# Altium PCB if-amp.PcbDoc
Units mm, origin at the board's own origin, x right, y up, seen from the top; angles counter-clockwise.
Board outline 50 x 50 mm, 2 copper layers (Top Layer, Bottom Layer), stack 1.57 mm thick; 38 components, 17 nets, 78 pads, 96 vias.
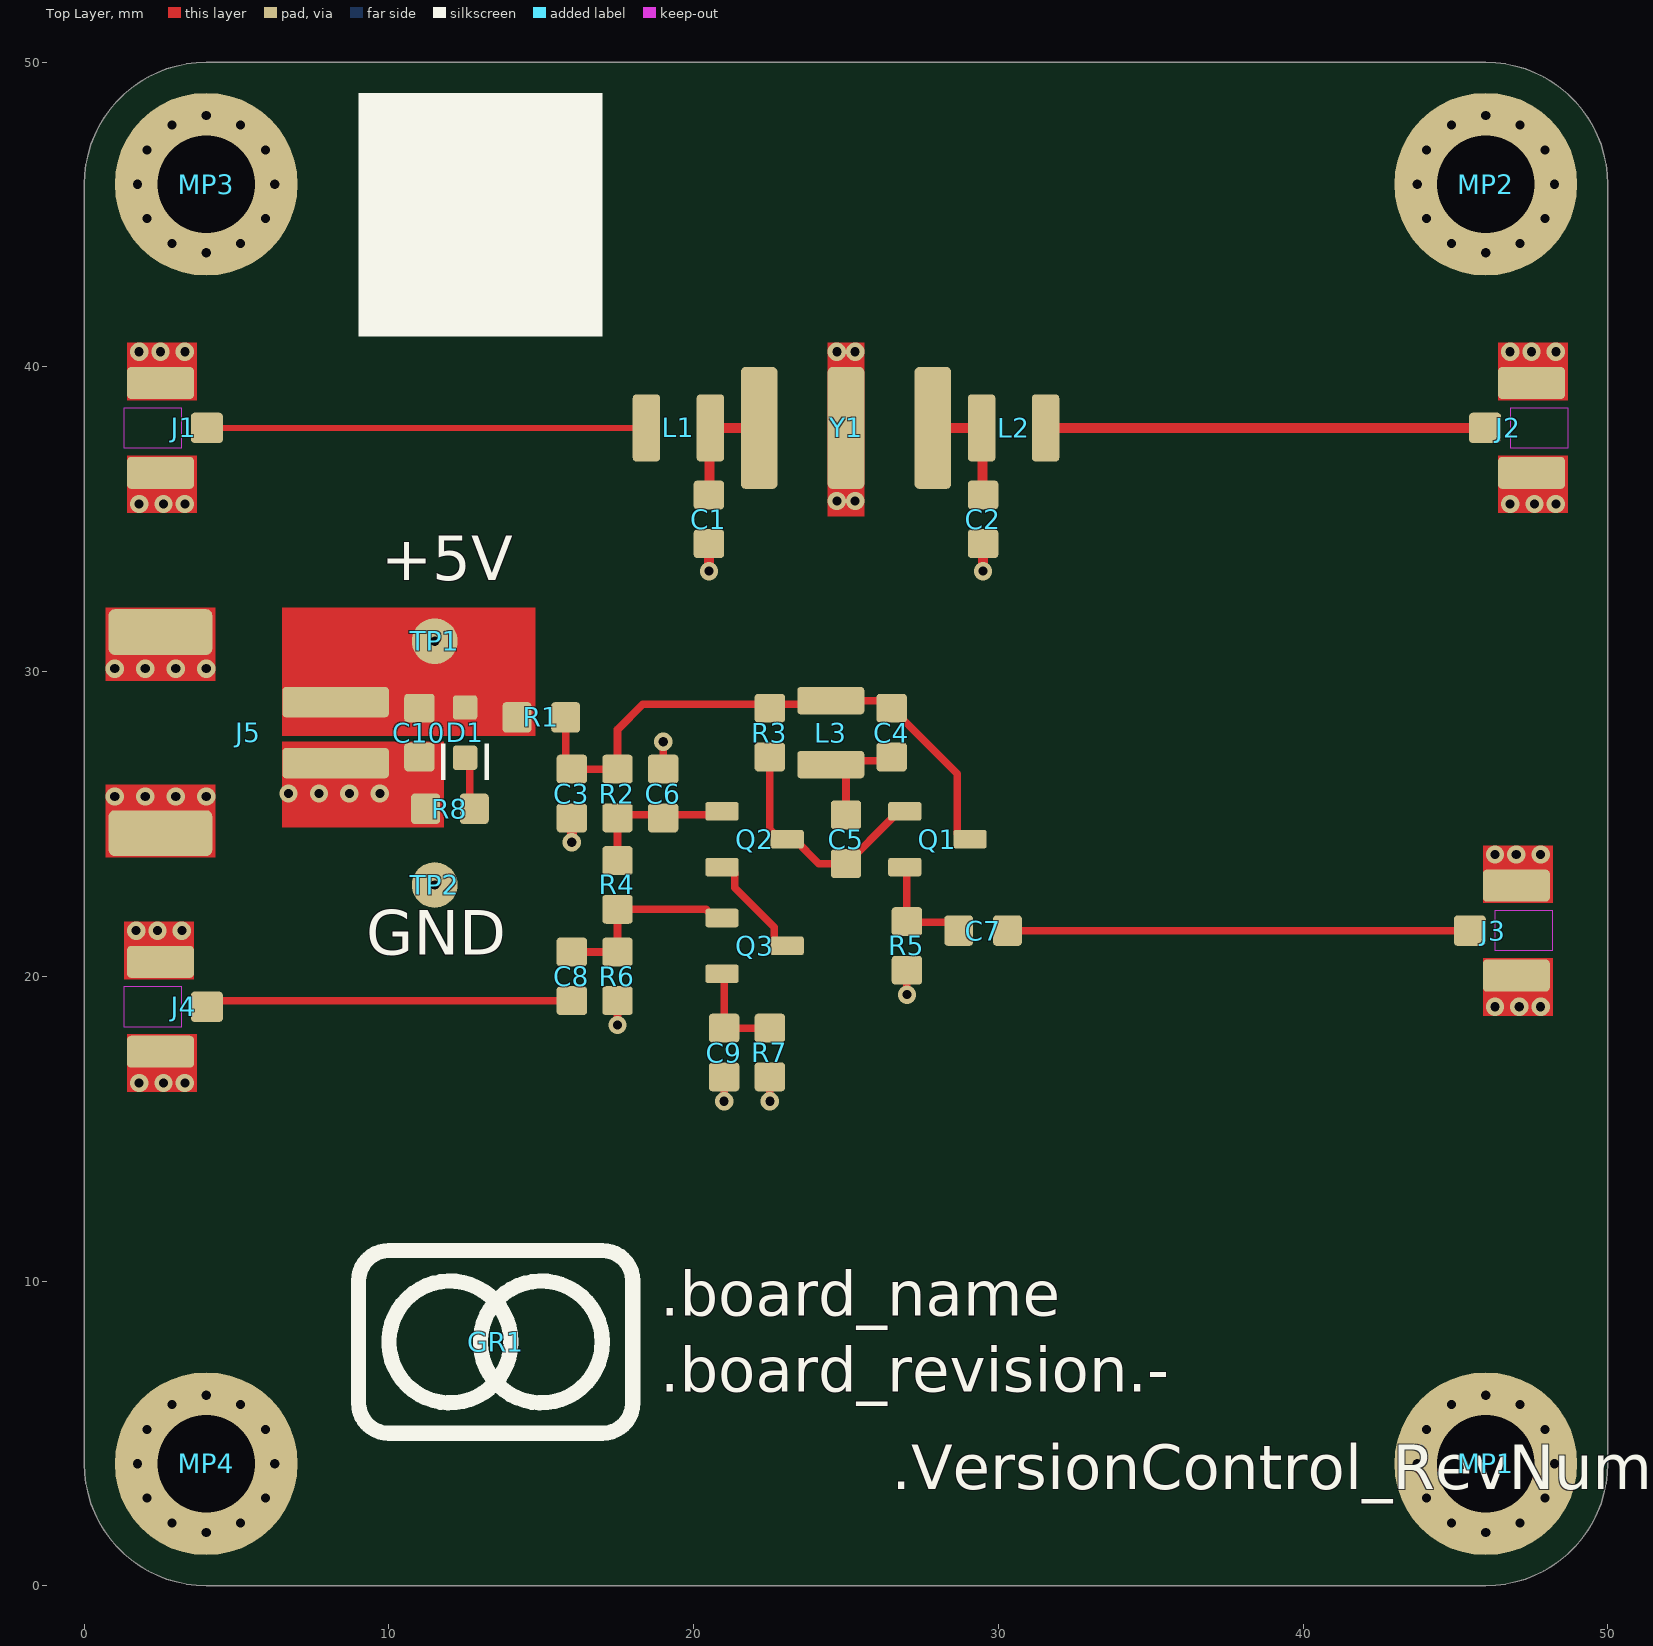
[diagram p0: Top Layer view]
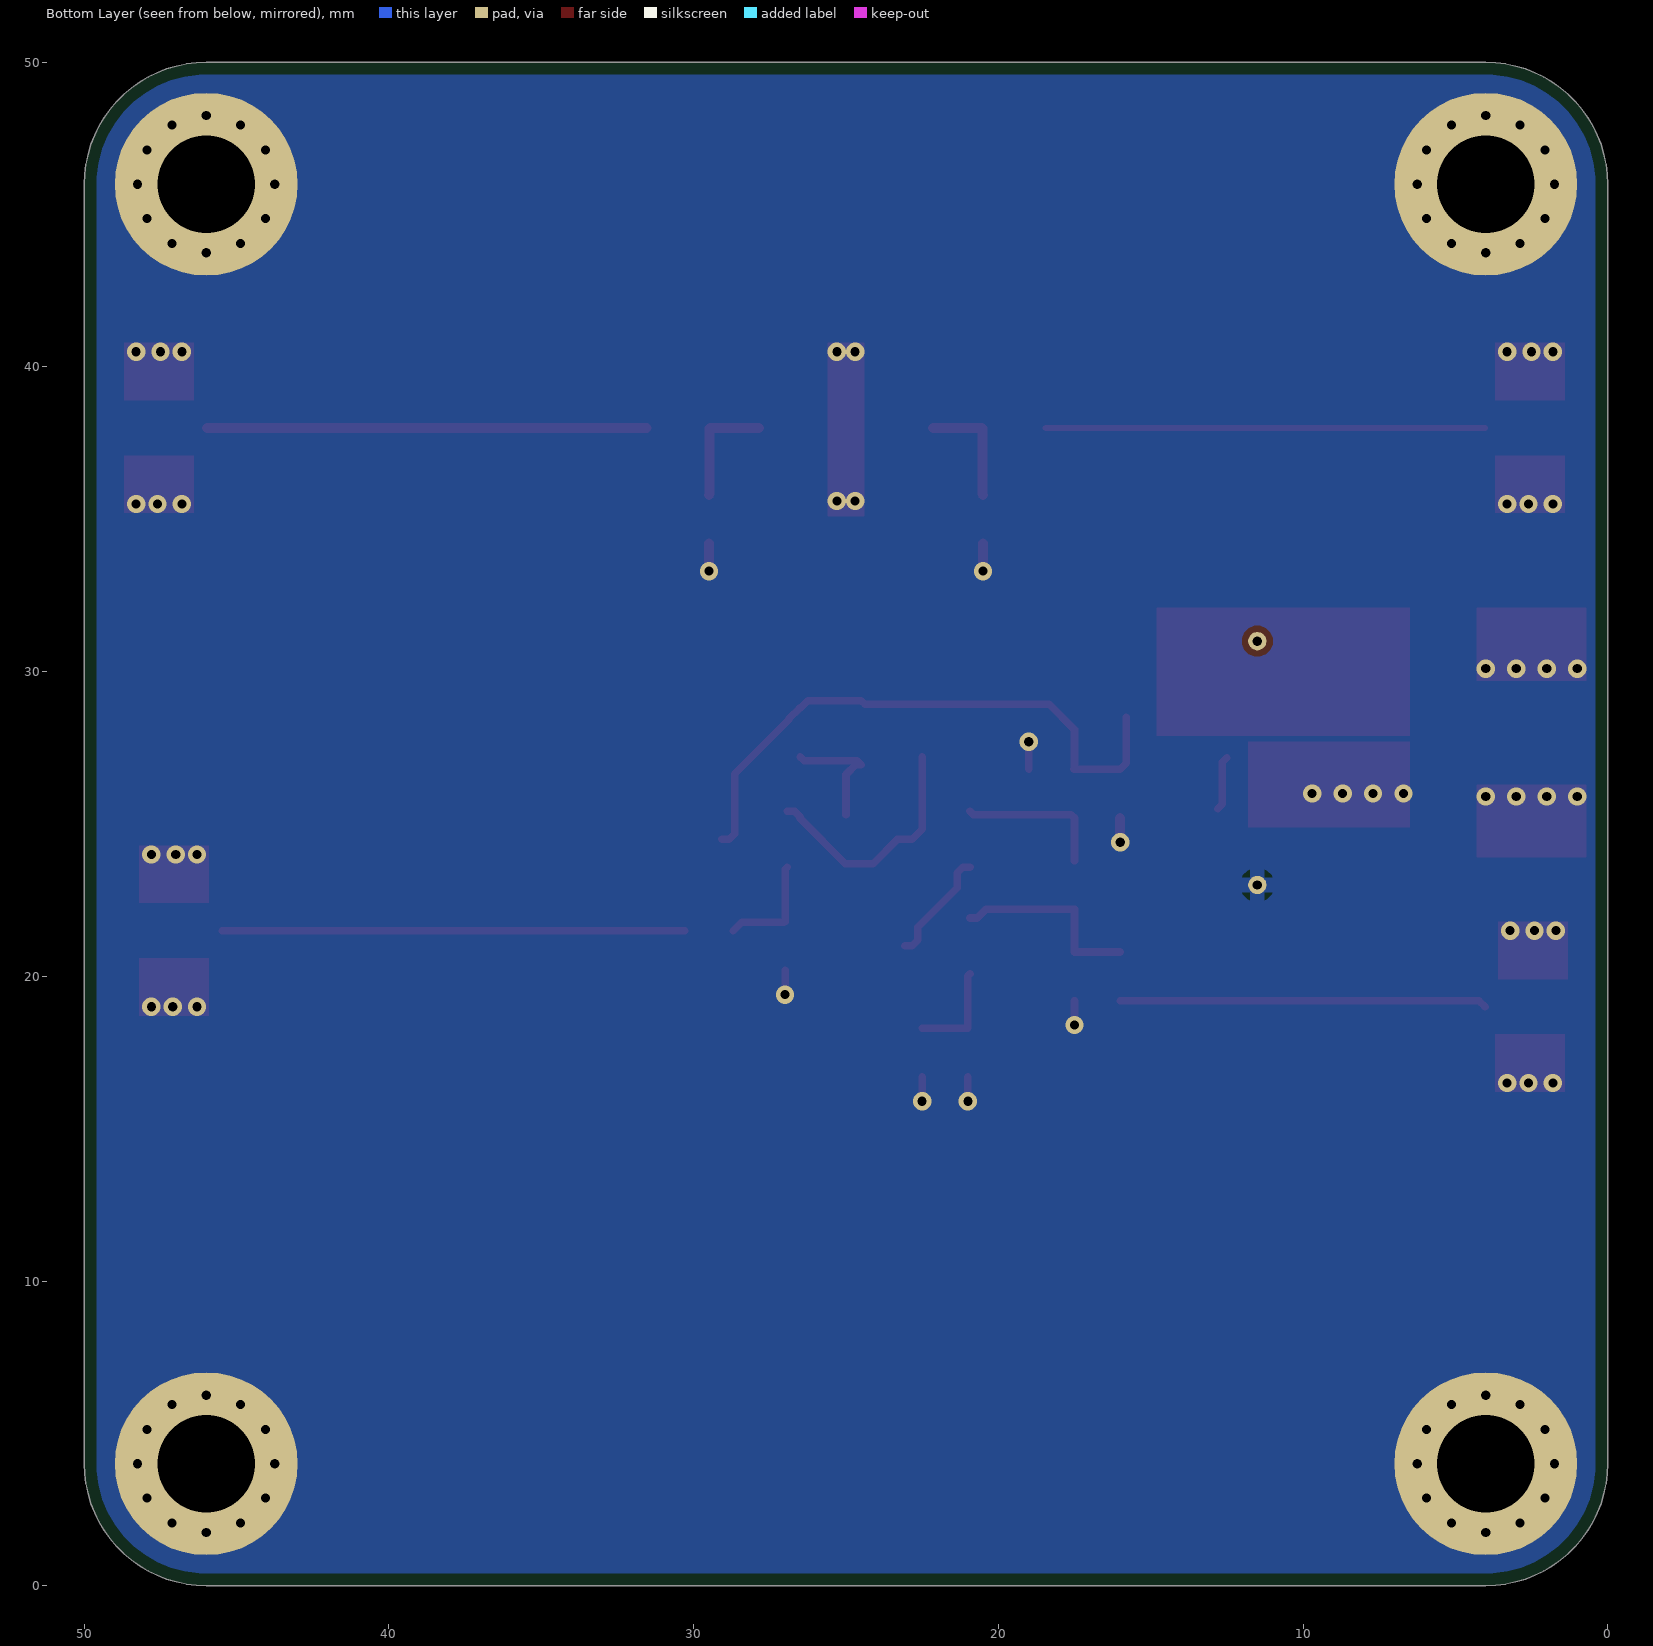
[diagram p1: Bottom Layer view, seen from below]
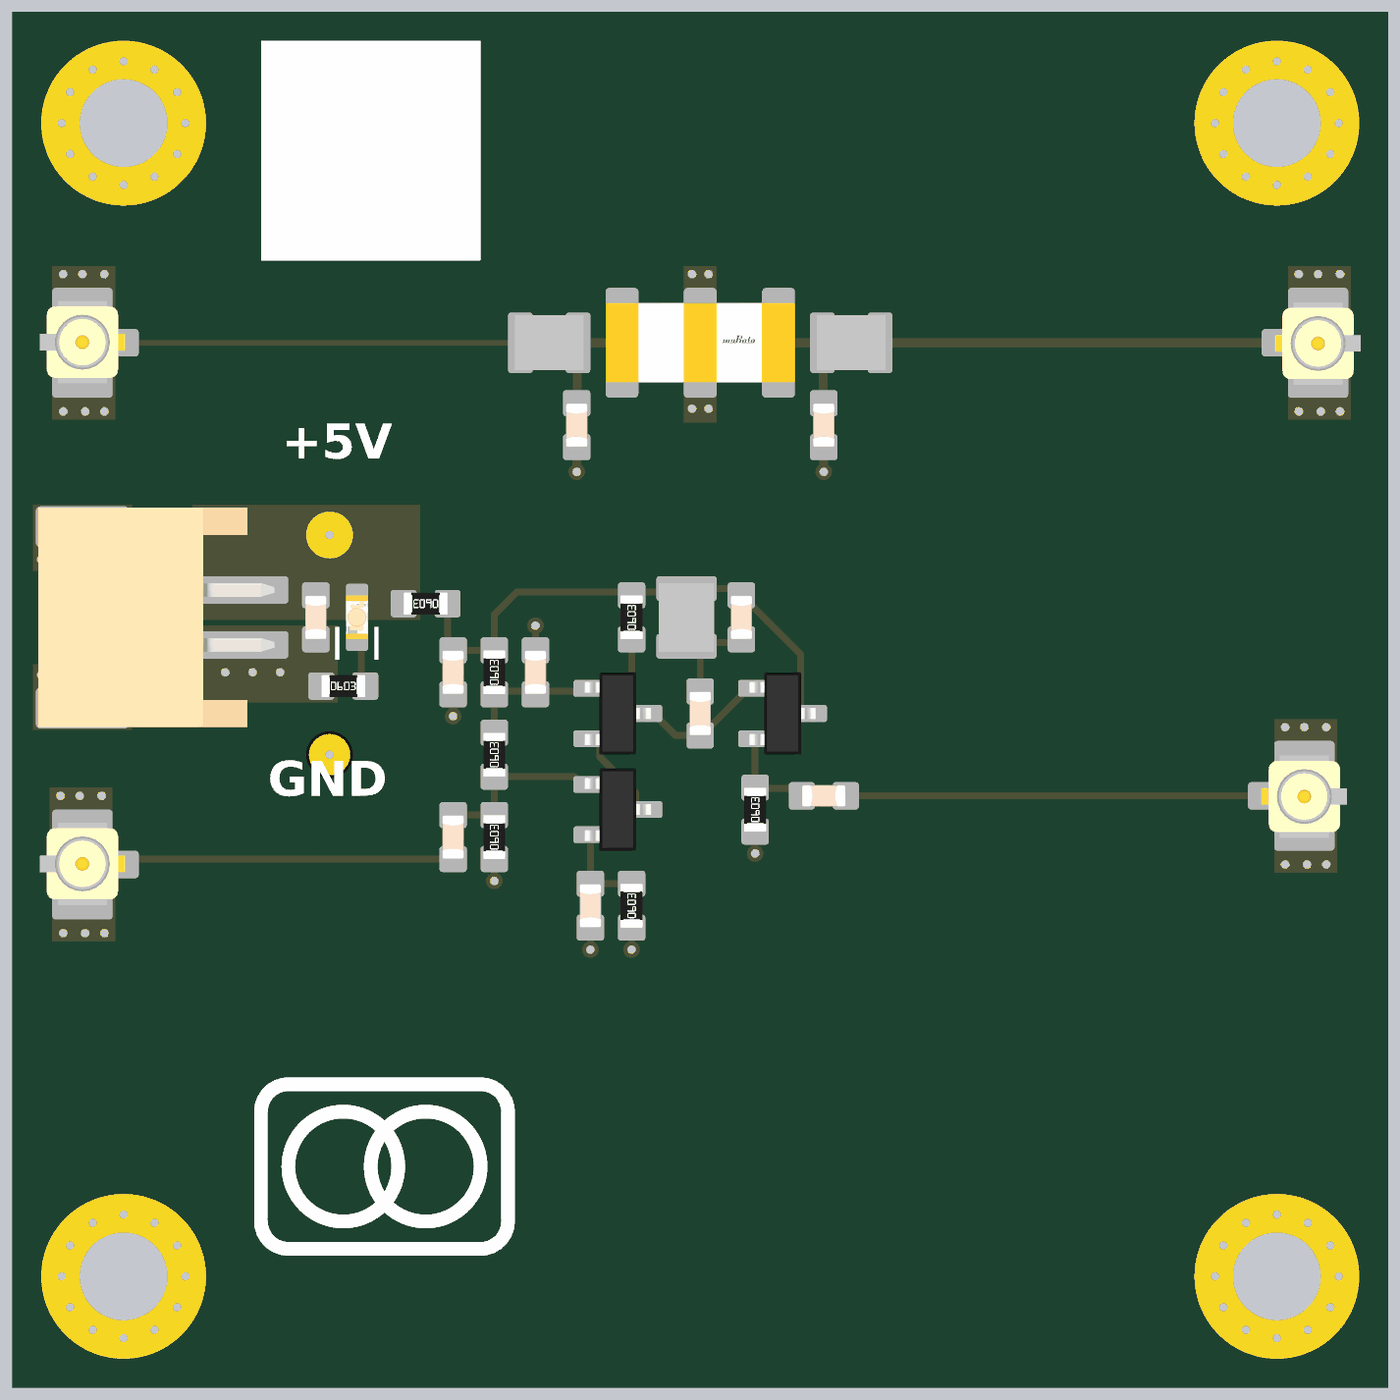
[diagram p2: 3D render of the assembled board from above, using the file's embedded part models]

## Layer stack, top to bottom
Top Solder: solder mask 0.0102, Solder Resist, Dk 3.5
Top Layer: signal copper 0.0356
Dielectric 1: core 1.4986, Core-043, Dk 4.3
Bottom Layer: signal copper 0.0356
Bottom Solder: solder mask 0.0102, Solder Resist, Dk 3.5

## Board outline
0,4 ccw(c4,4) 4,0 46,0 ccw(c46,4) 50,4 50,46 ccw(c46,46) 46,50 4,50 ccw(c4,46) 0,46

## Design rules (kind name [scope] priority, off if disabled: settings)
BoardOutlineClearance [IsElectrical or IsPoly] p1: gap=0.4 ignorepadtopadclearanceinfootprint=FALSE
Clearance Clearance_SelectiveSoldering [ispad and IsThruPin and not InComponentClass('NoSelectiveSoldering') vs ispad and IsSMTPin] p1 off: gap=4 ignorepadtopadclearanceinfootprint=TRUE // excludes smt studs
Clearance Clearance_NTPH_to_Track [IsTrack vs IsPad and IsThruPin and not PadIsPlated] p2: gap=0.254 ignorepadtopadclearanceinfootprint=TRUE
Clearance Clearance_TH_Pad_to_TH_Pad [IsPad and IsThruPin vs IsPad and IsThruPin] p3: gap=0.5 ignorepadtopadclearanceinfootprint=TRUE
Clearance Clearance_SMT_Pad_to_SMT_Pad [IsPad and IsSMTPin vs IsPad and IsSMTPin] p4: gap=0 ignorepadtopadclearanceinfootprint=TRUE
Clearance Clearance_No_Via_in_Pad [IsPad and not InPadClass('Via_in_pad_allowed') vs (IsVia AND not HasFootprint('PTH-M3D6.5_VIA-RING'))] p5 off: gap=0.1 ignorepadtopadclearanceinfootprint=TRUE
Clearance Clearance_Others [All] p6: gap=0.2 ignorepadtopadclearanceinfootprint=FALSE except(0.127: SMDPad-SMDPad)
ComponentClearance OverlappingComponents [InComponentClass('Overlap') vs InComponentClass('Overlap')] p1: gap=-10 collisioncheckmode=3 verticalgap=0 showdistances=TRUE donotcheckwithout3dbody=TRUE
ComponentClearance [All] p2: gap=0 collisioncheckmode=3 verticalgap=0.254 showdistances=FALSE
DiffPairsRouting HDMI [InDifferentialPairClass('HDMI')] p1: maxlimit=0.2 minlimit=0.2 mostfreqgap=0.2 toplayer_minwidth=0.207 toplayer_maxwidth=0.207 toplayer_prefwidth=0.207 bottomlayer_minwidth=0.207 bottomlayer_maxwidth=0.207 bottomlayer_prefwidth=0.207 impedanceprofiledriven=TRUE maxuncoupledlength=12.7
DiffPairsRouting ETH [InDifferentialPairClass('ETH')] p2: maxlimit=0.2 minlimit=0.2 mostfreqgap=0.2 toplayer_minwidth=0.207 toplayer_maxwidth=0.207 toplayer_prefwidth=0.207 bottomlayer_minwidth=0.207 bottomlayer_maxwidth=0.207 bottomlayer_prefwidth=0.207 impedanceprofiledriven=TRUE maxuncoupledlength=12.7
DiffPairsRouting USB [InDifferentialPairClass('USB')] p3: maxlimit=0.235 minlimit=0.235 mostfreqgap=0.235 toplayer_minwidth=0.17 toplayer_maxwidth=0.17 toplayer_prefwidth=0.17 bottomlayer_minwidth=0.17 bottomlayer_maxwidth=0.17 bottomlayer_prefwidth=0.17 impedanceprofiledriven=TRUE maxuncoupledlength=12.7
HoleSize NPTH_HoleSize [IsPad And not PadIsPlated] p1: absolutevalues=TRUE maxlimit=3.7 minlimit=0.2 maxpercent=80.000 minpercent=20.000
HoleSize Pad_HoleSize [IsPad] p2: absolutevalues=TRUE maxlimit=4.2 minlimit=0.3 maxpercent=80.000 minpercent=20.000
HoleSize Via_HoleSize [IsVia] p3: absolutevalues=TRUE maxlimit=6.3 minlimit=0.2 maxpercent=80.000 minpercent=20.000
HoleToHoleClearance [All] p1: gap=0.254 allowstackedmicrovias=FALSE
MatchedLengths InterPair_skew_HDMI [InDifferentialPairClass('HDMI')] p1: tolerance=1 checknetsindiffpair=FALSE checkdiffpairvsdiffpair=TRUE checkxsignals=TRUE checkothers=TRUE
MatchedLengths IntraPair_skew_all_DiffPairs [InDifferentialPairClass('All Differential Pairs')] p2: tolerance=0.15 checknetsindiffpair=TRUE checkdiffpairvsdiffpair=FALSE checkxsignals=FALSE checkothers=FALSE
MinimumAnnularRing [All] p1: minimumring=0.13
MinimumSolderMaskSliver [All] p1: minsoldermaskwidth=0.2
PolygonConnect PolygonConnect_NonSoldering [All vs InComponentClass('NonSolder')] p1: connectstyle=Direct reliefconductorwidth=0.254 reliefentries=4 polygonreliefangle="90 Angle" airgapwidth=0.254
PolygonConnect [All] p2: thpad.connectstyle=Relief thpad.reliefconductorwidth=0.5 thpad.reliefentries=4 thpad.polygonreliefangle="90 Angle" thpad.airgapwidth=0.254 smdpad.connectstyle=Direct smdpad.reliefconductorwidth=0.5 smdpad.reliefentries=4 smdpad.polygonreliefangle="90 Angle" smdpad.airgapwidth=0.254 via.connectstyle=Direct via.reliefconductorwidth=0.5 via.reliefentries=4 via.polygonreliefangle="90 Angle" via.airgapwidth=0.254
RoutingVias [All] p1: holewidth=0.3 width=0.6 viastyle="Through Hole" minholewidth=0.3 minwidth=0.6 maxholewidth=0.3 maxwidth=0.6
SilkToSolderMaskClearance [IsPad] p1: minsilkscreentomaskgap=0.2 clearancetoexposedcopper=TRUE
SolderMaskExpansion SolderMaskExpansion_Via [IsVia] p1: expansion=0.102 istentingtop=TRUE
SolderMaskExpansion SolderMaskExpansion_notVia [not IsVia] p2: expansion=0.05 istentingtop=FALSE
SupplyNets "Schematic Supply Nets_1" [InNet('+5V')] p1: voltage=0.000
SupplyNets "Schematic Supply Nets_2" [InNet('GND')] p2: voltage=0.000
Width S50_Width [InNetClass('S50')] p1: maxlimit=0.172 minlimit=0.172 preferedwidth=0.172 impedanceprofiledriven=TRUE minimp=50.000000 maximp=50.000000 favimp=50.000000
Width Default_Width [All] p2: maxlimit=2.5 minlimit=0.15 preferedwidth=0.33
24 further rules are at their usual default settings.

## Classes and differential pairs
component class NonSolder: MP1 MP2 MP3 MP4

## Components (designator, comment, footprint, x,y, rotation, side; value= is the part's Value field where it differs from the comment)
C1 "Capacitor 100pF +/-5% 50V NP0 0603" 0603-C-N 20.5,35 r90 top value=100pF
C2 "Capacitor 100pF +/-5% 50V NP0 0603" 0603-C-N 29.5,35 r90 top value=100pF
C3 "Capacitor 100nF +/-10% 50V X7R 0603" 0603-C-N 16,26 r90 top value=100nF
C4 "Capacitor 33pF +/-5% 50V NP0 0603" 0603-C-N 26.5,28 r90 top value=33pF
C5 "Capacitor 100nF +/-10% 50V X7R 0603" 0603-C-N 25,24.5 r270 top value=100nF
C6 "Capacitor 100nF +/-10% 50V X7R 0603" 0603-C-N 19,26 r90 top value=100nF
C7 "Capacitor 100nF +/-10% 50V X7R 0603" 0603-C-N 29.5,21.5 r180 top value=100nF
C8 "Capacitor 100nF +/-10% 50V X7R 0603" 0603-C-N 16,20 r270 top value=100nF
C9 "Capacitor 100nF +/-10% 50V X7R 0603" 0603-C-N 21,17.5 r90 top value=100nF
C10 "Capacitor 100nF +/-10% 50V X7R 0603" 0603-C-N 11,28 r90 top value=100nF
D1 "150060GS84000" WL-SMCW_0603_150060xx8x000 12.5,28 r90 top
GR1 "Logo" LOGO_9x6mm 13.5,8 r0 top
J1 "U.FL-R-SMT(10)" HRS-U.FL-R-SMT_V 2.5,38 r90 top value=U.FL
J2 "U.FL-R-SMT(10)" HRS-U.FL-R-SMT_V 47.5,38 r270 top value=U.FL
J3 "U.FL-R-SMT(10)" HRS-U.FL-R-SMT_V 47,21.5 r270 top value=U.FL
J4 "U.FL-R-SMT(10)" HRS-U.FL-R-SMT_V 2.5,19 r90 top value=U.FL
J5 "620102131822" 620102131822 6.5,28 r270 top value=JST-PH
L1 "AISC-1008F-1R8G-T" WE-KI_1008 19.5,38 r0 top value=1.8uH
L2 "AISC-1008F-1R8G-T" WE-KI_1008 30.5,38 r0 top value=1.8uH
L3 "AISC-1008F-4R7G-T" WE-KI_1008 24.5,28 r90 top value=4.7uH
MP1 "MountingHole" PTH-M3D6.5_VIA-RING 46,4 r0 top
MP2 "MountingHole" PTH-M3D6.5_VIA-RING 46,46 r0 top
MP3 "MountingHole" PTH-M3D6.5_VIA-RING 4,46 r0 top
MP4 "MountingHole" PTH-M3D6.5_VIA-RING 4,4 r0 top
Q1 "MMBT3904" SOT-23-3-N 28,24.5 r0 top
Q2 "MMBT3904" SOT-23-3-N 22,24.5 r0 top
Q3 "MMBT3904" SOT-23-3-N 22,21 r0 top
R1 "Resistor 10R +/-1% 50V 0603" 0603-R-N 15,28.5 r180 top value=10
R2 "Resistor 24k +/-1% 50V 0603" 0603-R-N 17.5,26 r90 top value=24k
R3 "Resistor 1k +/-1% 50V 0603" 0603-R-N 22.5,28 r90 top value=1k
R4 "Resistor 10k +/-1% 50V 0603" 0603-R-N 17.5,23 r90 top value=10k
R5 "Resistor 1.2k +/-1% 50V 0603" 0603-R-N 27,21 r90 top value=1.2k
R6 "Resistor 10k +/-1% 50V 0603" 0603-R-N 17.5,20 r90 top value=10k
R7 "Resistor 220R +/-1% 0.1W 0603" 0603-R-N 22.5,17.5 r90 top value=220
R8 "Resistor 10k +/-1% 50V 0603" 0603-R-N 12,25.5 r0 top value=10k
TP1 "Testpad with multiple sizes" TP_1.5mm_0.3mmHole 11.5,31 r0 top
TP2 "Testpad with multiple sizes" TP_1.5mm_0.3mmHole 11.5,23 r0 top
Y1 "SFECV10M7JA00-R0" FP-SFECV10M7JA00-R0-MFG 25,38 r0 top

## Footprints (in the part's own frame and the unit in brackets; to place one, negate y for a bottom-side part, rotate by r counter-clockwise, add the part's x,y. Pads: shape width x height; smd on the part's side, far side on the other; paste and mask are expansions set on the pad)
0603-C-N [mm]
  rrect25% 0.95x1 smd: 1(-0.8,0) 2(0.8,0)
  body extent -0.8,-0.4 0.8,0.4, height 0.81
0603-R-N [mm]
  rrect25% 0.95x1 smd: 1(-0.8,0) 2(0.8,0)
  body extent -0.8,-0.4 0.8,0.4, height 0.47
620102131822 [mm] "2.00mm SMT Male Horizontal Shrouded Header, 2p"
  rrect25% 1x3.5 smd: 1(-1,1.75) 2(1,1.75)
  rrect25% 1.5x3.4 smd: MP1(-3.3,-4) MP2(3.3,-4)
  body extent -4,-5.6 4,3, height 5.57
FP-SFECV10M7JA00-R0-MFG [mm]
  rrect25% 1.2x4 smd paste+0 mask+0: 1(-2.85,0) 2(0,0) 3(2.85,0)
  body extent -3.7,-2.1 3.7,2.1, height 0.25
HRS-U.FL-R-SMT_V [mm] "SMD, 3-Leads, Body 2.6x2.6mm"
  rrect25% 1.05x2.2 smd: 1(-1.475,0) 2(1.475,0)
  rrect25% 1x1.05 smd: 3(0,-1.525)
  Top Layer keep-out region: -0.65,-0.7 0.65,-0.7 0.65,1.2 -0.65,1.2
  body extent -1.48,-1.55 1.52,1.55, height 1.25
LOGO_9x6mm [mm]
  silkscreen extent -4.5,-3 4.5,3
PTH-M3D6.5_VIA-RING [mm]
  round 6 hole 3.2: 1(0,0)
SOT-23-3-N [mm] "SOT-23, 3-Leads, Body 3x1.4mm, Pitch 0.95mm, IPC Medium Density"
  rrect25% 1.09x0.61 smd: 1(-1.07,0.915) 2(-1.07,-0.915) 3(1.07,0)
  body extent -1.22,-1.5 1.22,1.5, height 1
TP_1.5mm_0.3mmHole [mm] "Centering hole to keep your DMM-probe in place so that it doesn't skid off to other signals."
  round 1.5 / inner round 0.6 / far side round 0.6 hole 0.3 mask+0.102: 1(0,0)
WE-KI_1008 [mm] "SMD Wire Wound Ceramic Inductor, body 2.50x2.00mm"
  rrect25% 0.9x2.2 smd: 1(-1.05,0) 2(1.05,0)
  body extent -1.25,-1 1.25,1, height 1.12
WL-SMCW_0603_150060xx8x000 [mm] "SMD Mono-color Chip LED, body 1.6x0.8mm"
  rrect25% 0.8x0.8 smd: 1(-0.825,0) 2(0.825,0)
  silkscreen extent -1.55,-0.78 -0.35,0.79, body extent -0.8,-0.4 0.8,0.4, height 0.95

## Part data
C1 C2: library part CMP-072-000128-18, "WCAP-CSGP Multilayer Ceramic Chip Capacitor, General Purpose, size 0603, NP0, 100pF, 50VDC", Capacitor Type=MLCC, Case/Package=0603, Dielectric=NP0, Insulation Resistance=10GO, JLCPCB Basic part=Yes, JLCPCB Part #=C14858, Max Operating Temperature=125°C, Min Operating Temperature=-55°C, Tolerance=5%, Voltage Rating=50V, ComponentLink1Description="Website Link", ComponentLink1URL=https://www.we-online.com/redexpert/article/885012006057?ad, ComponentLink2Description="Datasheet Link", ComponentLink2URL=https://www.we-online.com/redexpert/spec/885012006057?ad, Design Item ID=885012006057, Height=0.8mm, Length=1.6mm, Match Code=WCAP-CSGP, Mounting Technology=SMT, Packaging="Tape and Reel", Page Part #=CCQJ101, Pins=2, Q Factor=1000, Source=WCAP-CSGP.SchLib, Technical Reference=NP00603101J050DFCT10000, Usage="General Purpose", Width=0.8mm
C3 C5 C6 C7 C8 C9 C10: library part CMP-001-00017-25, "Capacitor MLCC, General Purpose, size 0603, X7R, 100nF, +/-10%, 50V", Capacitor Type=MLCC, Case/Package=0603, Dielectric=X7R, JLCPCB Basic part=Yes, JLCPCB Part #=C14663, Max Operating Temperature=125°C, Min Operating Temperature=-55°C, Tolerance=10%, Voltage Rating=50V, Height=0.8mm, Length=1.6mm, Mounting Technology=SMT, Page Part #=CCQK104, Pins=2, RoHS Compliant=True, Usage="General Purpose", Width=0.8mm
C4: library part CMP-072-000125-15, "WCAP-CSGP Multilayer Ceramic Chip Capacitor, General Purpose, size 0603, NP0, 33pF, 50VDC", Capacitor Type=MLCC, Case/Package=0603, Dielectric=NP0, Insulation Resistance=10GO, Max Operating Temperature=125°C, Min Operating Temperature=-55°C, Tolerance=5%, Voltage Rating=50V, ComponentLink1Description="Website Link", ComponentLink1URL=https://www.we-online.com/redexpert/article/885012006054?ad, ComponentLink2Description="Datasheet Link", ComponentLink2URL=https://www.we-online.com/redexpert/spec/885012006054?ad, Design Item ID=885012006054, Height=0.8mm, Length=1.6mm, Match Code=WCAP-CSGP, Mounting Technology=SMT, Packaging="Tape and Reel", Pins=2, Q Factor=1000, Source=WCAP-CSGP.SchLib, Technical Reference=NP00603330J050DFCT10000, Usage="General Purpose", Width=0.8mm
D1: library part CMP-002-001076-16, "WL-SMCW Mono-color Chip LED Waterclear, size 0603, Green, 3.3V, 40°", Case/Size Code=0603, Emitting Color=Green, Forward Voltage=3.3V, JLCPCB Part #=C7429914, Manufacturer="Wurth Elektronik", Operating Temperature Max=85°C, Operating Temperature Min=-40°C, Category="Signal LEDs", Chip Technology=InGaN, Component Type=Standard, ComponentLink1Description="Website Link", ComponentLink1URL=https://www.we-online.com/redexpert/article/150060GS84000?ad, ComponentLink2Description="Datasheet Link", ComponentLink2URL=https://www.we-online.com/redexpert/spec/150060GS84000?ad, Design Item ID=150060GS84000, Dominant Wavelength=525nm, Height=0.95mm, Length=1.6mm, Luminous Intensity=3000mcd, Manufacturer Part Number=150060GS84000, Match Code=WL-SMCW, Mount="Surface Mount", Packaging="Tape and Reel", Page Part #=MOVPA-0270A, Peak Wavelength=520nm, Pin Count=2, Source=WL-SMCW.SchLib, Viewing Angle=40°, Width=0.8mm
J1 J2 J3 J4: library part CMP-002-00035-12, "Ultra Small Surface Mount Coaxial Connector, 50 Ohm, -40 to 90 degC, 3-Pin SMD, RoHS, Tape and Reel", Case/Package=U.FL-R-SMT, JLCPCB Part #=C88373, Manufacturer="Hirose Electric", Max Operating Temperature=90°C, Min Operating Temperature=-40°C, Package Description="3-Pin Surface Mount Device, Body 2.6 x 2.6 mm", Package Quantity=2500, Resistance=50Ohm, Connector Type=RF&Coax, Contact Material=Brass, Contact Plating=Gold, Datasheet URL=https://www.hirose.com/product/en/download_file/key_name/U.FL/category/Catalog/doc_file_id/31697/?file_category_id=4&item_id=15&is_series=1, Datasheet Version=Aug-16, Fastening Type=Snap, Impedance=50Ohm, Manufacturer URL=https://www.hirose.com, Mounting Technology=SM, Package Reference=U.FL-R-SMT, Packaging=TapeandReel, RoHS Compliant=True
J5: library part CMP-047-000040-15, "WR-WTB SMT Male Horizontal Shrouded Header, pitch 2mm, 2p", Contact Resistance=20mOhm, JLCPCB Part #=C295747, Operating Temperature="-25 to +85degC", Rated Current=2A, Withstanding Voltage=800VAC, Working Voltage=100VAC, Component Type=Standard, ComponentLink1Description=Manufacturer, ComponentLink1URL=http://www.we-online.de, ComponentLink2Description=Datasheet, ComponentLink2URL=https://www.we-online.com/catalog/datasheet/620102131822.pdf, Design Item ID=620102131822, Gender=Male, Mounting Technology=SMT, Packaging="Tape and Reel", Page Part #=K620102131822, Part number=620102131822, Pin Count=2, Pin Number=2, Pitch=2mm, Published Date="January 2020", Publisher="Wurth Elektronik", Source=WR-WTB_2.00mm.SchLib, Type=Horizontal
L1 L2: library part CMP-006-00043-1, "Ind Chip Unshielded Wirewound 1.8uH 2% 7.9MHz 39Q-Factor Ferrite 600mA 1008 T/R", Case Code (Imperial)=1008, Case Code (Metric)=2520, Current Rating=600mA, DC Resistance (DCR)=840mR, Max DC Current=1A, Max Operating Temperature=85°C, Min Operating Temperature=-40°C, Package Quantity=1, Self Resonant Frequency=170MHz, Test Frequency=7.9MHz, Tolerance=2%, Case/Package=1008, Core Material=Ferrite, Height=2.29mm, Length=0.114inch, Mounting Technology="Surface Mount", Packaging="Tape and Reel", Q Factor=39, Series=AISC-1008F, Shielding=Unshielded, Termination=SMD/SMT, Width=2.79mm
L3: library part CMP-006-00044-1, "Inductor RF Wirewound 4.7uH 2% 7.9MHz 31Q-Factor Ferrite 0.4A 1.68Ohm DCR 1008 T/R", Case Code (Imperial)=1008, Case Code (Metric)=2520, Current Rating=400mA, DC Resistance (DCR)=1.68R, Max DC Current=1A, Max Operating Temperature=125°C, Min Operating Temperature=-40°C, Package Quantity=1, Self Resonant Frequency=60MHz, Test Frequency=7.9MHz, Tolerance=2%, Case/Package=1008, Core Material=Ferrite, Height=0.09inch, Length=0.114inch, Mounting Technology="Surface Mount", Packaging="Tape and Reel", Q Factor=31, Series=AISC-1008F, Shielding=Unshielded, Termination=SMD/SMT, Width=2.79mm
MP1 MP2 MP3 MP4: library part CMP-00028-00004-15, "Mounting hole.  Add this so that mounting holes placed in your design don't automagically disappear when you import changes from the schematic.", Pins=1
Q1 Q2 Q3: library part CMP-014-00026-4, "NPN General Purpose Amplifier, 40 V, 0.2 A, -55 to 150 degC, 3-Pin SOT23, RoHS, Tape and Reel", Case/Package=TO-236-3, Frequency=300MHz, JLCPCB Part #=C20526, Manufacturer="Fairchild Semiconductor", Max Operating Temperature=150°C, Min Operating Temperature=-55°C, Package Description="3-Pin Small Outline Transistor, Body 2.92 x 1.325 mm, Pitch 0.95 mm", Package Quantity=3000, Package Reference=SOT23-3, Package Version="Rev. 12, 03/2016", Power=625mW, Datasheet URL=https://www.fairchildsemi.com/datasheets/MM/MMBT3904.pdf, Datasheet Version="Rev. 1.1.0, 10/2014", Elements=1, hFE Min=100, Manufacturer URL=https://www.fairchildsemi.com/, Mounting Technology=SM, Package URL=http://www.fairchildsemi.com/dwg/MA/MA03D.pdf, Packaging=TapeandReel, Pins=3, RoHS Compliant=True, Vce Max=300mV
R1: library part CMP-009-00230-19, "Chip Resistor, Thick Film, General Purpose, 0603, 100mW, 50V, 10 Ohm, +/-1%", Case/Package=0603, JLCPCB Part #=C22859, Max Operating Temperature=155°C, Min Operating Temperature=-55°C, Power Rating=100mW, Resistor Type="Thick Film", Temperature Coefficient=200ppm/°C, Tolerance=1%, Voltage Rating=50V, Elements=1, Mounting Technology=SMT, Page Part #=ROQF1009, Pins=2, RoHS Compliant=Yes, Usage="General Purpose"
R2: library part CMP-009-00194-21, "Chip Resistor, Thick Film, General Purpose, 0603, 100mW, 50V, 24 kOhm, +/-1%", Case/Package=0603, Max Operating Temperature=155°C, Min Operating Temperature=-55°C, Power Rating=100mW, Resistor Type="Thick Film", Temperature Coefficient=100ppm/°C, Tolerance=1%, Voltage Rating=50V, Elements=1, Mounting Technology=SMT, Pins=2, Usage="General Purpose"
R3: library part CMP-009-00014-29, "Chip Resistor, Thick Film, General Purpose, 0603, 100mW, 50V, 1 kOhm, +/-1%", Case/Package=0603, JLCPCB Part #=C21190, Max Operating Temperature=155°C, Min Operating Temperature=-55°C, Power Rating=100mW, Resistor Type="Thick Film", Tolerance=1%, Voltage Rating=50V, Elements=1, FLIR Part #=YRES1K-1, Mounting Technology=SMT, Page Part #=ROQF1001, Pins=2, RoHS Compliant=Yes, Usage="General Purpose"
R4 R6 R8: library part CMP-009-00017-29, "Chip Resistor, Thick Film, General Purpose, 0603, 100mW, 50V, 10 kOhm, +/-1%", Case/Package=0603, JLCPCB Basic part=Yes, JLCPCB Part #=C25804, Max Operating Temperature=155°C, Min Operating Temperature=-55°C, Power Rating=100mW, Resistor Type="Thick Film", Tolerance=1%, Voltage Rating=50V, Elements=1, FLIR Part #=YRES10K-1, Mounting Technology=SMT, Page Part #=ROQF1002, Pins=2, RoHS Compliant=Yes, Usage="General Purpose"
R5: library part CMP-009-00244-17, "Chip Resistor, Thick Film, General Purpose, 0603, 100mW, 50V, 1.2 kOhm, +/-1%", Case/Package=0603, JLCPCB Part #=C22765, Max Operating Temperature=155°C, Min Operating Temperature=-55°C, Power Rating=100mW, Resistor Type="Thick Film", Tolerance=1%, Voltage Rating=50V, Elements=1, Mounting Technology=SMT, Pins=2, RoHS Compliant=Yes, Usage="General Purpose"
R7: library part CMP-009-00390-2, "Res Thick Film 0603 220 Ohm 1% 0.1W(1/10W) ±100ppm/C Pad SMD T/R Automotive AEC-Q200", Case Code (Imperial)=0603, Case Code (Metric)=1608, JLCPCB Part #=C22962, Max Operating Temperature=155°C, Max Power Dissipation=100mW, Min Operating Temperature=-55°C, Temperature Coefficient=100ppm/°C, Tolerance=1%, Voltage Rating=75V, Case/Package=0603, Contact Plating=Tin,Matte, Features="Automotive AEC-Q200", Height=0.022inch, Lead Free="Lead Free", Length=0.061inch, Mounting Technology="Surface Mount", Number of Terminations=2, Packaging="Tape and Reel", Page Part #=ROQF2200, Power Rating=100mW, Radiation Hardening=No, RoHS Compliant=Yes, Series=RMCF, Width=0.031inch
TP1 TP2: library part CMP-027-000000-17, "Testpad land", Component Type=Standard, Design Item ID=Testpad, Pin Count=1
Y1: library part CMP-003-00038-1, "SFECV Series 10.7 MHz 2 Element 150 kHz Bw 330 Ohm Surface Mount Ceramic Filter", Case Code (Imperial)=2706, Case Code (Metric)=6915, Case/Package=SMD/SMT, Frequency=10.7MHz, Max Operating Temperature=80°C, Min Operating Temperature=-20°C, Package Quantity=1, Bandwidth=150kHz, Filter Type=FM, Height=0.067inch, Impedance=330R, Insertion Loss=5.5dB, Lead Free="Lead Free", Length=0.272inch, Mounting Technology="Surface Mount", Packaging="Tape and Reel", Pins=3, Radiation Hardening=No, RoHS Compliant=Yes, Series="CERAFIL®, SFECV", Termination=SMD/SMT, Width=0.059inch

## Via types
v1: diameter 0.6, hole 0.3, Top Layer to Bottom Layer, tented both sides, 96 vias

## Nets (pads, with @x,y where several pads share a name; then routed paths per layer and width w, separated by ;. In a path a pad name is that pad's centre, name@x,y a point inside that pad or via, vN(x,y) a via of type N, cw(c..) or ccw(c..) an arc to the next point about the centre after c; other vN are vias at no path point)
+5V: C10.2 D1.2 J5.1 R1.2 TP1.1
GND: C1.1 C2.1 C3.1 C6.2 C9.1 C10.1 J1.1 J1.2 J2.1 J2.2 J3.1 J3.2 J4.1 J4.2 J5.2 J5.MP1 J5.MP2 MP1.1 MP2.1 MP3.1 MP4.1 R5.1 R6.1 R7.1 R8.1 TP2.1 Y1.2 | length 6.7
  Top Layer w0.25: v1(17.5,18.4) R6.1 ; C6.2 v1(19,27.7) ; v1(21,15.9) C9.1 ; v1(22.5,15.9) R7.1 ; v1(27,19.4) R5.1
  Top Layer w0.33: v1(16,24.4) C3.1 ; v1(20.5,33.3) C1.1 ; v1(29.5,33.3) C2.1
  other v1: 4,1.75 46,1.75 2.875,2.051 5.125,2.051 44.875,2.051 47.125,2.051 2.051,2.875 5.949,2.875 44.051,2.875 47.949,2.875 1.75,4 6.25,4 43.75,4 48.25,4 2.051,5.125 5.949,5.125 44.051,5.125 47.949,5.125 2.875,5.949 5.125,5.949 44.875,5.949 47.125,5.949 4,6.25 46,6.25 1.8,16.5 2.6,16.5 3.3,16.5 46.3,19 47.1,19 47.8,19 1.7,21.5 2.4,21.5 3.2,21.5 46.3,24 47,24 47.8,24 1,25.9 2,25.9 3,25.9 4,25.9 6.7,26 7.7,26 8.7,26 9.7,26 1,30.1 2,30.1 3,30.1 4,30.1 1.8,35.5 2.6,35.5 3.3,35.5 46.8,35.5 47.6,35.5 48.3,35.5 24.7,35.6 25.3,35.6 1.8,40.5 2.5,40.5 3.3,40.5 24.7,40.5 25.3,40.5 46.8,40.5 47.5,40.5 48.3,40.5 4,43.75 46,43.75 2.875,44.051 5.125,44.051 44.875,44.051 47.125,44.051 2.051,44.875 5.949,44.875 44.051,44.875 47.949,44.875 1.75,46 6.25,46 43.75,46 48.25,46 2.051,47.125 5.949,47.125 44.051,47.125 47.949,47.125 2.875,47.949 5.125,47.949 44.875,47.949 47.125,47.949 4,48.25 46,48.25
NetC1_2: C1.2 L1.2 Y1.1 | length 3.8
  Top Layer w0.33: C1.2 20.525,35.825 20.525,37.975 L1.2 Y1.1
NetC2_2: C2.2 L2.1 Y1.3 | length 3.8
  Top Layer w0.33: Y1.3 L2.1 29.475,37.975 29.475,35.825 C2.2
NetC3_2: C3.2 C4.2 L3.2 Q1.3 R1.1 R2.2 R3.2 | length 19.6
  Top Layer w0.25: R1.1 15.8,27 C3.2 R2.2@17.525,26.8 ; R2.2 17.5,28.1 18.325,28.925 22.5,28.925 24.375,28.925 L3.2 26.25,29.05 C4.2 26.525,28.8 26.875,28.45 26.875,28.425 28.65,26.65 28.65,24.68 28.83,24.5 Q1.3
NetC4_1: C4.1 C5.1 L3.1 | length 4.1
  Top Layer w0.25: C5.1 25,26.625 24.675,26.95 L3.1 24.625,27.075 26.375,27.075 C4.1
NetC5_2: C5.2 Q1.1 Q2.3 R3.1 | length 8
  Top Layer w0.25: R3.1 22.5,24.83 22.83,24.5 Q2.3 23.31,24.5 24.11,23.7 C5.2 ; C5.2@25.025,23.7 26.51,25.185 26.51,25.235 26.69,25.415 Q1.1
NetC6_1: C6.1 Q2.1 R2.1 R4.2 | length 4.9
  Top Layer w0.25: R4.2 R2.1 17.608,25.307 20.822,25.307 Q2.1
NetC7_1: C7.1 J3.3 | length 15.2
  Top Layer w0.25: C7.1 J3.3
NetC7_2: C7.2 Q1.2 R5.2 | length 3.6
  Top Layer w0.25: Q1.2 27,23.515 R5.2 27.022,21.778 28.422,21.778 C7.2
NetC8_1: C8.1 Q3.1 R4.1 R6.2 | length 6.4
  Top Layer w0.25: C8.1 R6.2 R4.1 20.405,22.2 20.69,21.915 Q3.1
NetC8_2: C8.2 J4.3 | length 12.1
  Top Layer w0.25: J4.3 4.225,19.2 C8.2
NetC9_2: C9.2 Q3.2 R7.2 | length 3.3
  Top Layer w0.25: Q3.2 21,20.015 C9.2 R7.2
NetD1_1: D1.1 R8.2 | length 1.8
  Top Layer w0.25: D1.1 12.65,27.025 12.65,25.65 R8.2
NetJ1_1: J1.3 L1.1 | length 14.4
  Top Layer w0.2: J1.3 L1.1
NetJ2_1: J2.3 L2.2 | length 14.4
  Top Layer w0.33: L2.2 J2.3
NetQ2_2: Q2.2 Q3.3 | length 3.8
  Top Layer w0.25: Q2.2 21.17,23.585 21.35,23.405 21.35,22.905 22.65,21.605 22.65,21.18 22.83,21 Q3.3

## Polygon pours and split planes (outlines as drawn)
GND on Bottom Layer "GND_L02_P000" (solid, remove dead copper, pour order 0): 0,0 0,50 50,50 50,0

## Other copper
Top Layer:
  rectangle net GND: 24.4,35.1 25.6,40.8
  region net GND: 4.3,26.3 0.7,26.3 0.7,23.9 4.3,23.9
  rectangle net GND: 0.7,29.7 4.3,32.1
  region net GND: 48.2,20.6 45.9,20.6 45.9,18.7 48.2,18.7
  rectangle net GND: 45.9,22.4 48.2,24.3
  region net GND: 48.7,37.1 46.4,37.1 46.4,35.2 48.7,35.2
  rectangle net GND: 46.4,38.9 48.7,40.8
  region net GND: 3.7,18.1 1.4,18.1 1.4,16.2 3.7,16.2
  rectangle net GND: 1.3,19.9 3.6,21.8
  region net GND: 3.7,37.1 1.4,37.1 1.4,35.2 3.7,35.2
  rectangle net GND: 1.4,38.9 3.7,40.8
  region net +5V: 6.5,27.9 14.8,27.9 14.8,32.1 6.5,32.1
  region net GND: 6.5,27.7 11.8,27.7 11.8,24.9 6.5,24.9

## Silkscreen, mask and mechanical layers (free items; w line width, h text height)
Top Overlay:
  rectangle: 9,41 17,49
  text "+5V" at 9.75,32.519 h2.5
  text "GND" at 9.25,20.232 h2.5
  text ".board_name / .board_revision.-" at 18.897,5.885 h2.5
  text ".VersionControl_RevNumberShort" at 26.5,2.693 h2.5
Board outline:
  the board outline again, w0.1
Fab Notes:
  lines w0.025: 100.253,26.226 102.265,28.239 105.313,31.287 108.361,34.335 111.409,37.383 114.457,40.431 ; 100.253,27.75 100.741,28.239 103.789,31.287 106.837,34.335 109.885,37.383 112.933,40.431 114.457,41.955 ; 100.253,29.274 102.265,31.287 105.313,34.335 108.361,37.383 111.409,40.431 114.457,43.479 ; 100.253,30.798 100.741,31.287 103.789,34.335 106.837,37.383 109.885,40.431 112.933,43.479 114.457,45.003 ; 100.253,32.322 102.265,34.335 105.313,37.383 108.361,40.431 111.409,43.479 114.457,46.527 ; 100.253,33.846 100.741,34.335 103.789,37.383 106.837,40.431 109.885,43.479 112.933,46.527 ; 100.253,35.37 102.265,37.383 105.313,40.431 108.361,43.479 111.409,46.527 ; 100.253,36.894 100.741,37.383 103.789,40.431 106.837,43.479 109.885,46.527 ; 100.253,38.418 102.265,40.431 105.313,43.479 108.361,46.527 ; 100.253,39.942 100.741,40.431 103.789,43.479 106.837,46.527 ; 100.253,41.466 102.265,43.479 105.313,46.527 ; 100.253,42.99 100.741,43.479 103.789,46.527 ; 100.253,44.514 102.265,46.527 ; 100.253,46.038 100.741,46.527 ; 100.741,25.191 103.789,28.239 106.837,31.287 109.885,34.335 112.933,37.383 114.457,38.907 ; 102.265,25.191 105.313,28.239 108.361,31.287 111.409,34.335 114.457,37.383 ; 103.789,25.191 106.837,28.239 109.885,31.287 112.933,34.335 114.457,35.859 ; 105.313,25.191 108.361,28.239 111.409,31.287 114.457,34.335 ; 106.837,25.191 109.885,28.239 112.933,31.287 114.457,32.811 ; 108.361,25.191 111.409,28.239 114.457,31.287 ; 109.885,25.191 112.933,28.239 114.457,29.763 ; 111.409,25.191 114.457,28.239 ; 112.933,25.191 114.457,26.715
  lines w0.381: 53.391,28.239 59.808,28.239 72.507,28.239 82.993,28.239 91.6,28.239 100.253,28.239 114.457,28.239 ; 53.391,31.287 59.808,31.287 72.507,31.287 82.993,31.287 91.6,31.287 100.253,31.287 114.457,31.287 ; 53.391,34.335 59.808,34.335 72.507,34.335 82.993,34.335 91.6,34.335 100.253,34.335 114.457,34.335 ; 53.391,37.383 59.808,37.383 72.507,37.383 82.993,37.383 91.6,37.383 100.253,37.383 114.457,37.383 ; 53.391,40.431 59.808,40.431 72.507,40.431 82.993,40.431 91.6,40.431 100.253,40.431 114.457,40.431 ; 53.391,43.479 59.808,43.479 72.507,43.479 82.993,43.479 91.6,43.479 100.253,43.479 114.457,43.479 ; 53.391,46.527 114.457,46.527 ; 59.808,49.575 59.808,25.191 ; 72.507,49.575 72.507,25.191 ; 82.993,49.575 82.993,25.191 ; 91.6,49.575 91.6,25.191 ; 100.253,49.575 100.253,25.191 ; 59.808,25.191 72.507,25.191 ; 59.808,25.191 53.391,25.191 53.391,49.575 114.457,49.575 114.457,25.191 100.253,25.191 ; 72.507,25.191 82.993,25.191 ; 82.993,25.191 91.6,25.191 ; 91.6,25.191 100.253,25.191
  text "Layer" at 54.915,47.289 h1.52
  text "Name" at 61.332,47.289 h1.52
  text "Material" at 74.031,47.289 h1.52
  text "Thickness" at 84.517,47.289 h1.52
  text "Constant" at 93.124,47.289 h1.52
  text "Board Layer Stack" at 101.777,47.289 h1.52
  text "Top Overlay" at 61.332,44.241 h1.52
  text "Top Solder" at 61.332,41.193 h1.52
  text "Solder Resist" at 74.031,41.193 h1.52
  text "0.010mm" at 84.517,41.193 h1.52
  text "3.5" at 93.124,41.193 h1.52
  text "1" at 54.915,38.145 h1.52
  text "Top Layer" at 61.332,38.145 h1.52
  text "0.036mm" at 84.517,38.145 h1.52
  text "Dielectric 1" at 61.332,35.097 h1.52
  text "Core-043" at 74.031,35.097 h1.52
  text "1.499mm" at 84.517,35.097 h1.52
  text "4.3" at 93.124,35.097 h1.52
  text "2" at 54.915,32.049 h1.52
  text "Bottom Layer" at 61.332,32.049 h1.52
  text "0.036mm" at 84.517,32.049 h1.52
  text "Bottom Solder" at 61.332,29.001 h1.52
  text "Solder Resist" at 74.031,29.001 h1.52
  text "0.010mm" at 84.517,29.001 h1.52
  text "3.5" at 93.124,29.001 h1.52
  text "Bottom Overlay" at 61.332,25.953 h1.52
  text "PCB Ordering guideline rigid / ---------------------------- / * Layer count : .Layer_Count / * Dimensions : .Board_Width x .Board_Height / * Deburring : Yes / * PCB Thickness : .Total_Thickness / * PCB Color : green / * Silkscreen : white / * Material type : >=FR4-TG155 / * Surface finish : HASL / * Outer copper weight : 1oz / * Via covering : Tented / * Minimum hole size : .Hole_Size_Min / * Board outline tolerance : +/- 0.2mm / * Mark on PCB : 2D barcode & Number | Data Matrix Code | .board_name _ABCDE_0001 | 8x8mm / * Gold fingers : No / * Beveling : No / * Castellated holes : No / * Press-fit holes : No / * Edge plating : No / * Blind slots : No / * Hole count : .Hole_Count / * SMD solder joints : .PadSMD_Count / * Through-hole solder joints : .PadThru_Count" at 53,-34.054 h2.5